# EAGLE board FED3_RGBaddon_v1 (EAGLE 9.6.2)
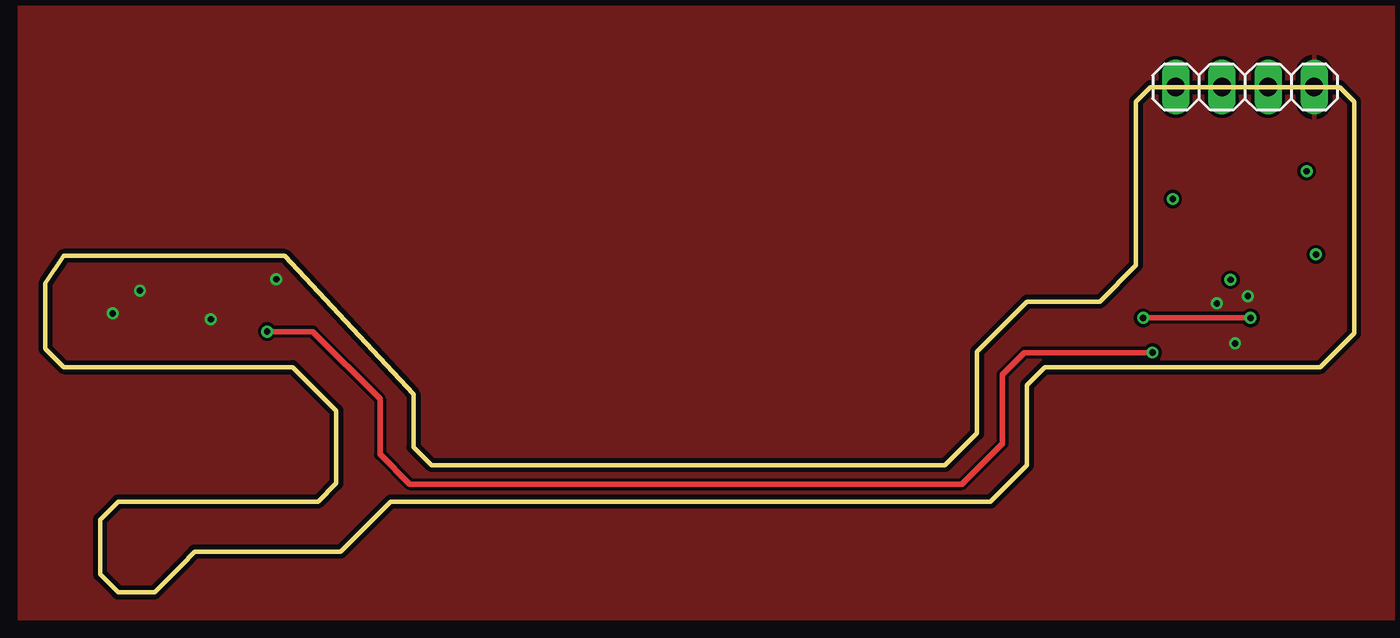
[diagram p0: board, top side]
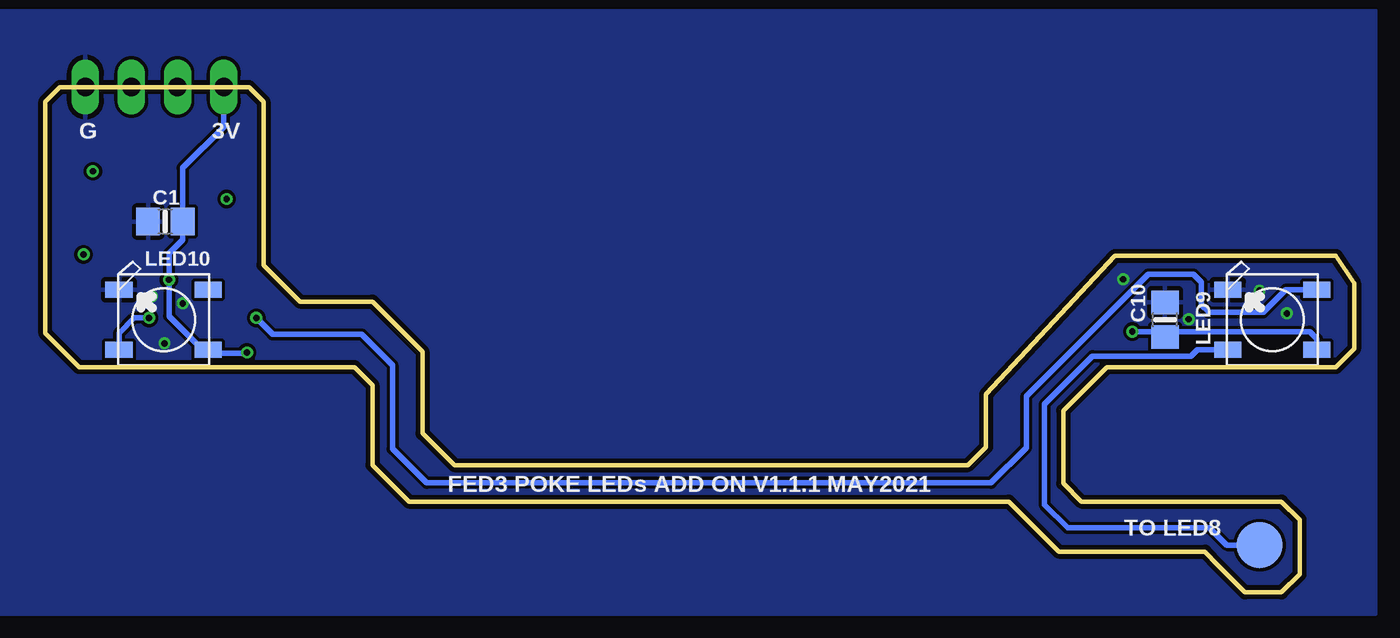
[diagram p1: board, bottom side, seen from below]

Size 72 x 27.8 mm. Coordinates in mm from the lower left corner, seen from the top.
Outline: 13.15,18.51 1,18.51 0,17 0,13.4 1,12.4 13.6,12.4 16,10 16,6 15,5 4,5 3,4 3,1 4,0 6,0 7.5,1.5 8.2,2.25 16.25,2.25 19,5 52,5 54,7 54,11.4 55,12.4 70.15,12.4 72,14.25 72,27 71.2,27.8 60.8,27.8 60,27 60,18 58,16 54,16 51.25,13.25 51.25,8.75 49.5,7 21.25,7 20.25,8 20.25,10.9 13.15,18.51
Copper layers (1*16): Top 0.035mm / dielectric 1.5mm / Bottom 0.035mm
Design rules "seeed-studio-2-layer *": minimum track width 6mil, minimum drill 12mil, track to track 7mil, track to pad 7mil, pad to pad 7mil, via to via 7mil, smd to smd 0mil, copper to edge 10mil, drill to drill 10mil, minimum pad ring 10mil, minimum via ring 6mil, stop-mask expansion 2mil, vias tented up to drill 100mil, thermal gap 10mil

## Footprints (pad centres in the part's own frame; a part is rotated, then mirrored left to right if it is on the bottom)
1X04 = drill 1.016 long: 1 -3.81,0; 2 -1.27,0; 3 1.27,0; 4 3.81,0
0805-NO = smd 1.3 x 1.5: 1 -0.95,0; 2 0.95,0
WS2812B = smd 1.5 x 0.9: 1-VDD 2.45,-1.65; 2-DOUT 2.45,1.65; 3-GND -2.45,1.65; 4-DIN -2.45,-1.65
B2,54 = smd 2.54 x 2.54: TP 0,0

## Placement (x,y rotation side)
AUX_I2C  [1X04]  66,27.8 0 top
C1  10uF  [0805-NO]  65.4,20.4 180 bottom
C10  10uF  [0805-NO]  10.4,15 90 bottom
LED9  WS2812B5050  [WS2812B]  4.5,15 0 bottom
LED10  WS2812B5050  [WS2812B]  65.5,15 0 bottom
NEOINPUT  PTR1B2,54  [B2,54]  5.2,2.6 0 bottom

## Library data of the parts
AUX_I2C = pinhead
C1 C10 LED9 LED10 = microbuilder
NEOINPUT = testpad

## Nets
3V3: AUX_I2C.1 C1.1 C10.1 LED9.1-VDD LED10.1-VDD
A1: LED9.4-DIN NEOINPUT.TP
GND: AUX_I2C.4 C1.2 C10.2 LED9.3-GND LED10.3-GND
N$17: LED9.2-DOUT LED10.4-DIN

## Tracks (layer width: path | path; a pad name or v marks a point on that pad's centre or on a via)
3V3  (via drill 0.35)
  Top 0.3: v60.91,13.2 53.86,13.2 52.66,11.99 52.66,8.18 50.43,5.96 20.04,5.96 18.4,7.6 18.4,10.65 14.7,14.35 v12.2,14.35 | AUX_I2C.1 v62.2,27.79 | 65.15,17.25 v65.2,17.2
  Bottom 0.3: LED9.1-VDD 2.05,13.95 2.45,14.35 10.6,14.35 | v12.2,14.35 v12.19,14.35 10.6,14.35 | v60.91,13.2 60.91,13.15 62.85,13.15 LED10.1-VDD 63.35,13.35 65.2,15.2 v65.2,17.2 65.2,18.65 64.45,19.4 C1.1 64.45,23.35 62.2,25.6 v62.2,27.79 | C10.1 10.4,14.15 10.6,14.35
A1
  Bottom 0.3: LED9.4-DIN 8.62,13.35 8.98,13 14.39,13 17.04,10.35 17.04,4.84 15.76,3.56 7.96,3.56 7,2.6 NEOINPUT.TP
GND  (via drill 0.35)
  other vias: 66.15,16.3 65.45,13.7 5.2,16.6 3.7,15.35 9.1,15.03 12.7,17.23 64.45,15.9
  pour Top: -1.44,32.22 74.16,32.22 74.16,-1.48 -1.44,-1.48
  pour Bottom: -1.22,32 74.59,32 74.59,-1.19 -1.22,-1.19
N$1  (via drill 0.35)
  other vias: 69.39,23.16
N$2  (via drill 0.35)
  other vias: 62.03,21.64
N$3  (via drill 0.35)
  other vias: 69.9,18.59
N$17  (via drill 0.35)
  Top 0.3: v66.3,15.1 v60.4,15.1
  Bottom 0.3: v60.4,15.1 59.5,14.2 54.6,14.2 52.9,12.5 52.9,7.9 51.03,6.03 19.98,6.03 18.04,7.97 18.04,10.79 11.33,17.5 8.83,17.5 8.4,17.07 8.4,15.8 8,15.4 5,15.4 3.75,16.65 LED9.2-DOUT | LED10.4-DIN 67.95,14.25 67.1,15.1 v66.3,15.1

## Text on the board
bNames: 3V | G | FED3 POKE LEDs ADD ON V1.1.1 MAY2021 | TO LED8